# Altium PCB Vapeix_EEPROM_TEST.PcbDoc
Units mm, origin at the board's own origin, x right, y up, seen from the top; angles counter-clockwise.
Board outline 20.17 x 18.64 mm, 5 copper layers (Top Layer, Mid-Layer 1, Mid-Layer 2, Internal Plane 2, Bottom Layer); 7 components, 5 nets, 22 pads, 13 vias.
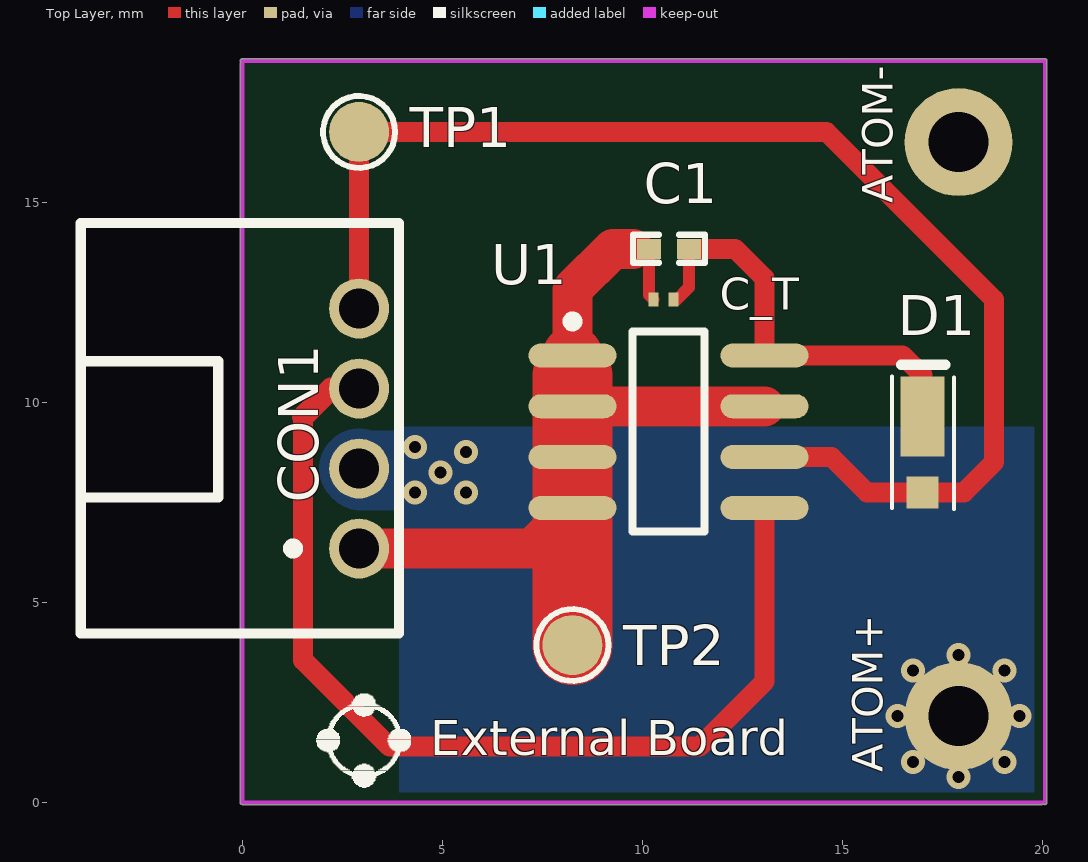
[diagram p0: Top Layer view]
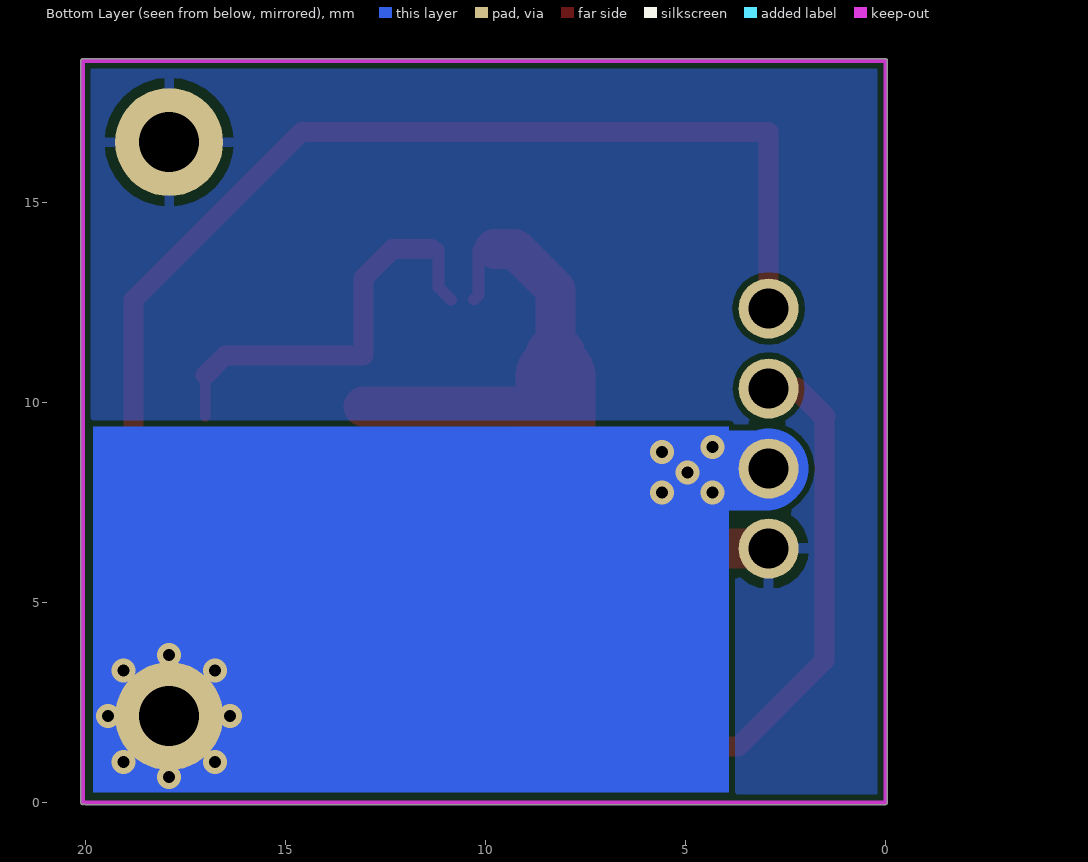
[diagram p1: Bottom Layer view, seen from below]
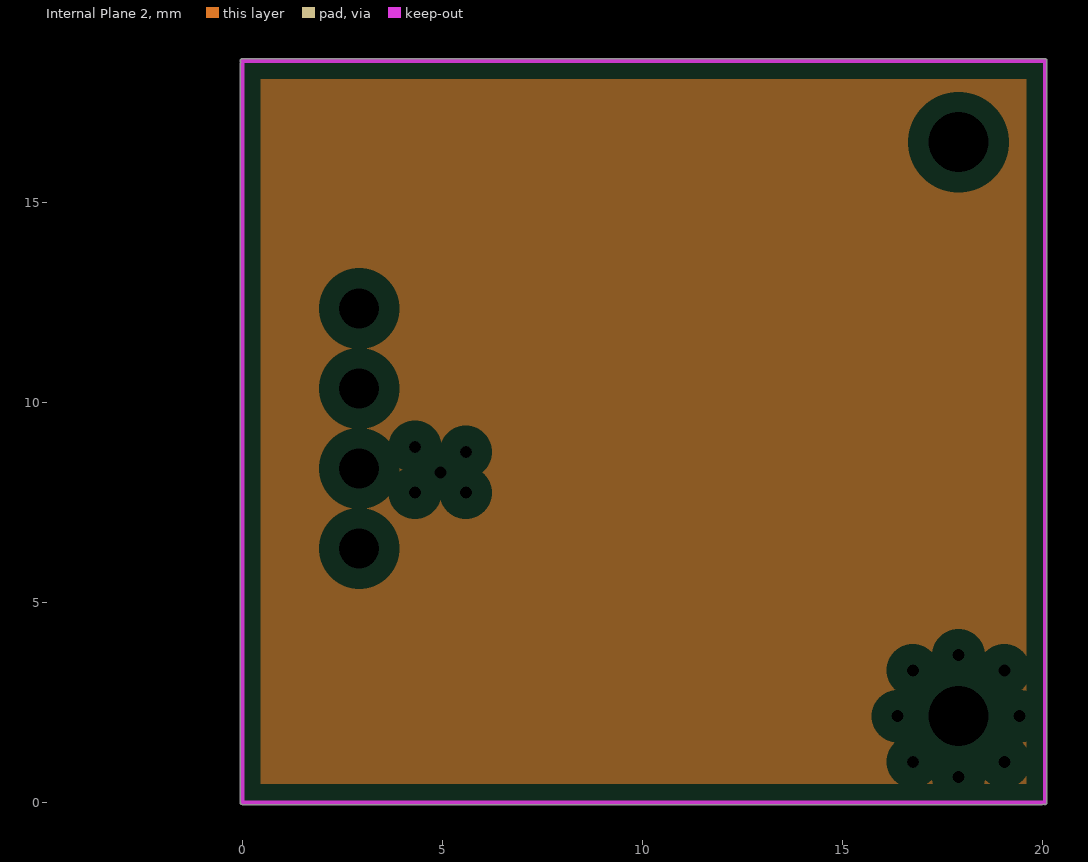
[diagram p2: Internal Plane 2, clearances drawn from the general rule]
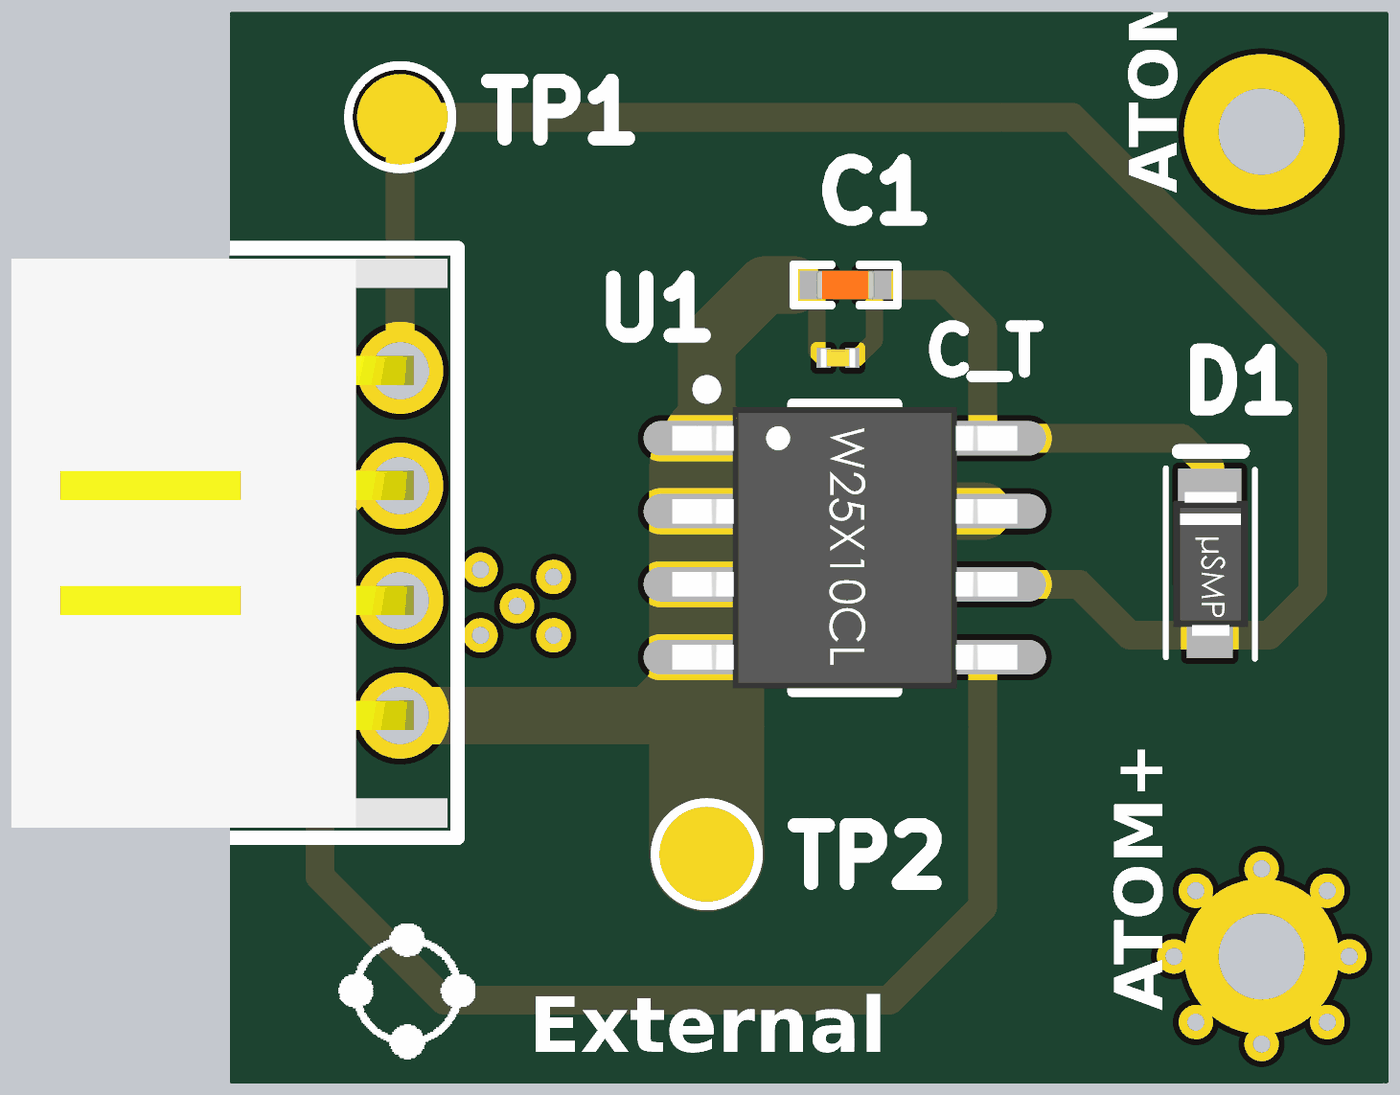
[diagram p3: 3D render of the assembled board from above, using the file's embedded part models]

## Layer stack, top to bottom
Top Solder: solder mask 0.0102, Solder Resist, Dk 3.5
Top Layer: signal copper 0.0356
Dielectric 1: dielectric 0.32, FR-4, Dk 4.8
Mid-Layer 1: signal copper 0.0356
Dielectric3: dielectric 0.32, FR-4, Dk 4.8
Mid-Layer 2: signal copper 0.0356
Dielectric4: dielectric 0.32, FR-4, Dk 4.8
Internal Plane 2: plane copper 0.0356
Dielectric2: dielectric 0.32, FR-4, Dk 4.8
Bottom Layer: signal copper 0.0356
Bottom Solder: solder mask 0.0102, Solder Resist, Dk 3.5

## Board outline
0,-0.05 cw(c0,0) -0.05,0 -0.05,18.47 cw(c0,18.47) -0.035,18.506 cw(c0,18.542) 0,18.592 20.066,18.592 cw(c20.066,18.542) 20.116,18.542 20.116,0 cw(c20.066,0) 20.033,-0.038 cw(c20,0) 20,-0.05

## Design rules (kind name [scope] priority, off if disabled: settings)
Clearance [All] p1: gap=0.15
ComponentClearance [All] p1 off: gap=0.254 collisioncheckmode=3 verticalgap=0.254 showdistances=FALSE
MinimumSolderMaskSliver [All] p1 off: minsoldermaskwidth=0.254
PlaneClearance [All] p1: clearance=0.508
PlaneConnect [All] p1: planeconnectstyle=Relief reliefexpansion=0.508 reliefentries=4 reliefconductorwidth=0.254 reliefairgap=0.254
PolygonConnect [All] p1: connectstyle=Relief reliefconductorwidth=0.254 reliefentries=4 polygonreliefangle="90 Angle" airgapwidth=0.254
RoutingLayers [All] p1: top layer_v5=TRUE mid layer 1_v5=FALSE mid layer 2_v5=FALSE bottom layer_v5=TRUE
RoutingVias [All] p1: holewidth=0.2 width=0.4 viastyle="Through Hole" minholewidth=0.2 minwidth=0.4 maxholewidth=0.711 maxwidth=1.27
ShortCircuit [All] p1 off: allowed=FALSE
SilkToSilkClearance [All] p1 off: silktosilkclearance=0.254
SilkToSolderMaskClearance [IsPad] p1 off: minsilkscreentomaskgap=0.254 clearancetoexposedcopper=TRUE
SolderMaskExpansion [All] p1: expansion=0.102
Width [All] p1: maxlimit=5 minlimit=0.1 preferedwidth=0.254
22 further rules are at their usual default settings.

## Components (designator, comment, footprint, x,y, rotation, side; value= is the part's Value field where it differs from the comment)
C1 "10uF" C0402 10.668,13.843 r0 top
C_T "DNP" C0201 10.287,12.573 r0 top
CON1 "ATM" S4B-PH-K-S 2.921,6.35 r90 top locked
D1 "MSS2P2-M3" MSS2P2-M3 17.018,9.652 r270 top
TP1 "TP" TP 2.921,16.764 r270 top
TP2 "TP" TP 8.255,3.937 r0 top
U1 "24AA01" 24AA01 8.255,11.176 r0 top

## Footprints (in the part's own frame and the unit in brackets; to place one, negate y for a bottom-side part, rotate by r counter-clockwise, add the part's x,y. Pads: shape width x height; smd on the part's side, far side on the other; paste and mask are expansions set on the pad)
24AA01 [mm] "IC EEPROM 1KBIT 400KHZ 8SOIC"
  oval 2.2x0.6 smd: 1(0,0) 2(0,-1.27) 3(0,-2.54) 4(0,-3.81) 5(4.8,-3.81) 6(4.8,-2.54) 7(4.8,-1.27) 8(4.8,0)
  silkscreen extent -0.12,-4.41 3.3,0.97, body extent -0.6,-4.36 5.4,0.54, height 1.55
C0201 [mm]
  rect 0.25x0.35 smd: 1(0,0) 2(0.5,0)
  body extent -0.11,-0.16 0.61,0.16, height 0.31
C0402 [mm]
  rect 0.6x0.5 smd: 1(-0.5,0) 2(0.5,0)
  silkscreen extent -0.9,-0.35 0.9,0.35, body extent -0.51,-0.25 0.51,0.25, height 0.5
MSS2P2-M3 [mm] "DIODE SCHOTTKY 20V 2A MICROSMP"
  rect 0.8x0.8 smd: 1(1.902,-0.013)
  rect 2x1.1 smd: 2(0.002,-0.013)
  silkscreen extent -1.29,-0.78 2.31,0.77, body extent -0.59,-0.65 1.91,0.65, height 0.66
S4B-PH-K-S [mm] "CONN HEADER PH SIDE 4POS 2MM"
  round 1.5 hole 1: 1(0,0) 2(2,0) 3(4,0) 4(6,0)
  silkscreen extent -2.13,-1 8.14,6.96, body extent -1.95,-0.83 7.95,6.77, height 4.8
TP [mm] "Test Point"
  round 1.5 smd paste-5: 1(0,0)
  silkscreen extent -0.9,-0.9 0.9,0.9

## Part data
C1 C_T: library part C0402-12p, "Capacitor, NP0, ±2%"
CON1: library part S4B-PH-K-S(LF)(SN), "CONN HEADER PH SIDE 4POS 2MM"
D1: library part MSS2P2-M3/89A, "DIODE SCHOTTKY 20V 2A MICROSMP"
TP1 TP2: "TEST POINT"
U1: library part 24AA01-I/SN, "IC EEPROM 1KBIT 400KHZ 8SOIC"

## Free pads (board coordinates)
  round 2.7 hole 1.5: 2(17.907,2.159) 2(17.907,16.51)

## Via types
v1: diameter 0.6, hole 0.3, Top Layer to Bottom Layer, 13 vias

## Nets (pads, with @x,y where several pads share a name; then routed paths per layer and width w, separated by ;. In a path a pad name is that pad's centre, name@x,y a point inside that pad or via, vN(x,y) a via of type N, cw(c..) or ccw(c..) an arc to the next point about the centre after c; other vN are vias at no path point)
ATOM: CON1.2 pad.2@17.907,2.159 | length 1.8
  Bottom Layer w2: CON1.2 2.971,8.3 4.654,8.3 v1@4.699,8.255
  other v1: 17.907,0.635 16.764,1.016 19.05,1.016 16.383,2.159 19.431,2.159 16.764,3.302 19.05,3.302 17.907,3.683 4.318,7.747 5.588,7.747 4.953,8.255 5.588,8.763 4.318,8.89
GND: C1.1 C_T.1 CON1.1 pad.2@17.907,16.51 TP2.1 U1.1 U1.2 U1.3 U1.4 U1.7 | length 28.7
  Top Layer w0.254: 8.255,6.731 8.255,10.668
  Top Layer w0.3: C1.1 10.168,12.692 C_T.1
  Top Layer w1: CON1.1 7.239,6.35 U1.4 ; U1.2 U1.7 ; U1.1 8.255,12.827 9.271,13.843 9.768,13.843
  Top Layer w1.5: U1.3 U1.1
  Top Layer w2: TP2.1 8.255,10.668
NetC1_2: C1.2 C_T.2 D1.2 U1.8 | length 10.5
  Top Layer w0.254: D1.2 17.005,10.681
  Top Layer w0.3: C_T.2@10.864,12.573 11.168,12.877 C1.2
  Top Layer w0.5: C1.2@11.343,13.843 12.319,13.843 13.055,13.107 U1.8 16.51,11.176 17.005,10.681
SCL: CON1.4 D1.1 TP1.1 U1.6 | length 32.5
  Top Layer w0.5: CON1.4 TP1.1 14.605,16.764 18.796,12.573 18.796,8.509 18.037,7.75 D1.1 15.618,7.75 14.732,8.636 U1.6
SDA: CON1.3 U1.5 | length 25.2
  Top Layer w0.5: 1.524,9.652 1.524,3.556 3.683,1.397 11.43,1.397 13.055,3.022 U1.5 ; CON1.3@2.222,10.35 CON1.3
  Top Layer w0.55: 1.524,9.652 CON1.3@2.222,10.35

## Polygon pours and split planes (outlines as drawn)
GND on Top Layer "Top Layer-GND" (solid, remove dead copper, pour order 0): 0,18.592 0.05,18.542 20.116,18.542
GND on Bottom Layer "Bottom Layer-GND" (solid, remove dead copper, pour order 2): -0.035,18.506 0.051,18.592 20.066,18.592 20.066,0.05 20.116,0 0,0 0,18.542
no net on Internal Plane 2 (split plane): 19.606,0.46 0.46,0.46 0.46,18.082 19.606,18.082

## Keep-outs
Keep-Out Layer:
  lines w0.1: 0,18.47 0,0 20,0 ; 0,18.542 20.066,18.542 20.066,0

## Other copper
Bottom Layer:
  rectangle net ATOM: 3.918,0.254 19.812,9.398

## Silkscreen, mask and mechanical layers (free items; w line width, h text height)
Top Overlay:
  drawing of 171 lines, arcs and shapes, not listed
  text "ATOM-" at 16.51,14.986 h1.3 r90
  text "External Board" at 4.699,0.889 h1.5
  text "ATOM+" at 16.256,0.762 h1.3 r90

## Dimensions
0,0 to 20,0 on Mechanical 1
0,0 to 0,18.47 on Mechanical 1